# Altium PCB PCB1.PcbDoc
Units mm, origin at the board's own origin, x right, y up, seen from the top; angles counter-clockwise.
Board outline 66.04 x 68.83 mm, 2 copper layers (Top Layer, Bottom Layer); 57 components, 46 nets, 160 pads, 23 vias.
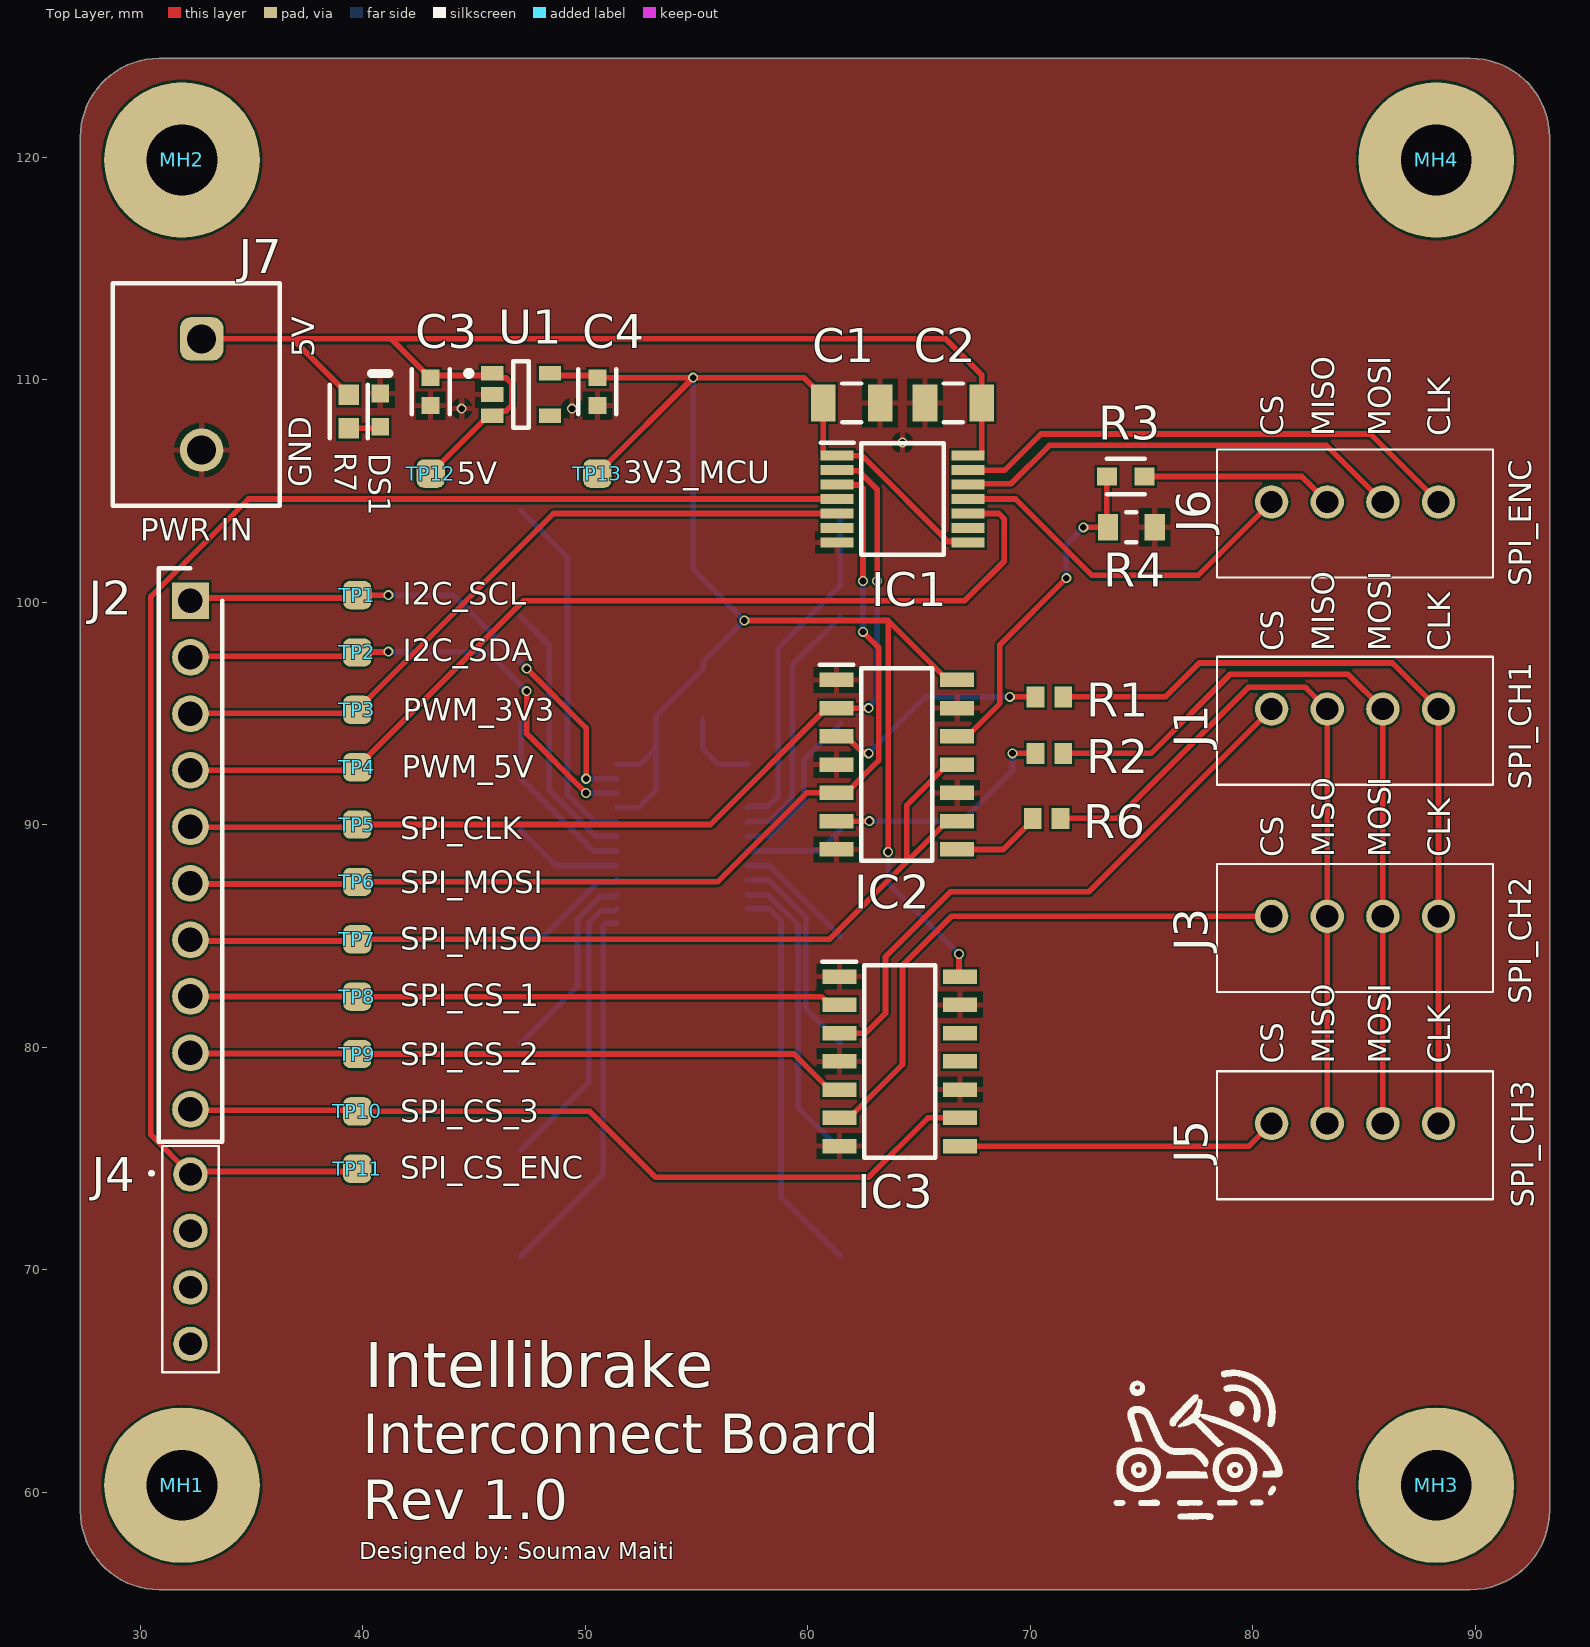
[diagram p0: Top Layer view]
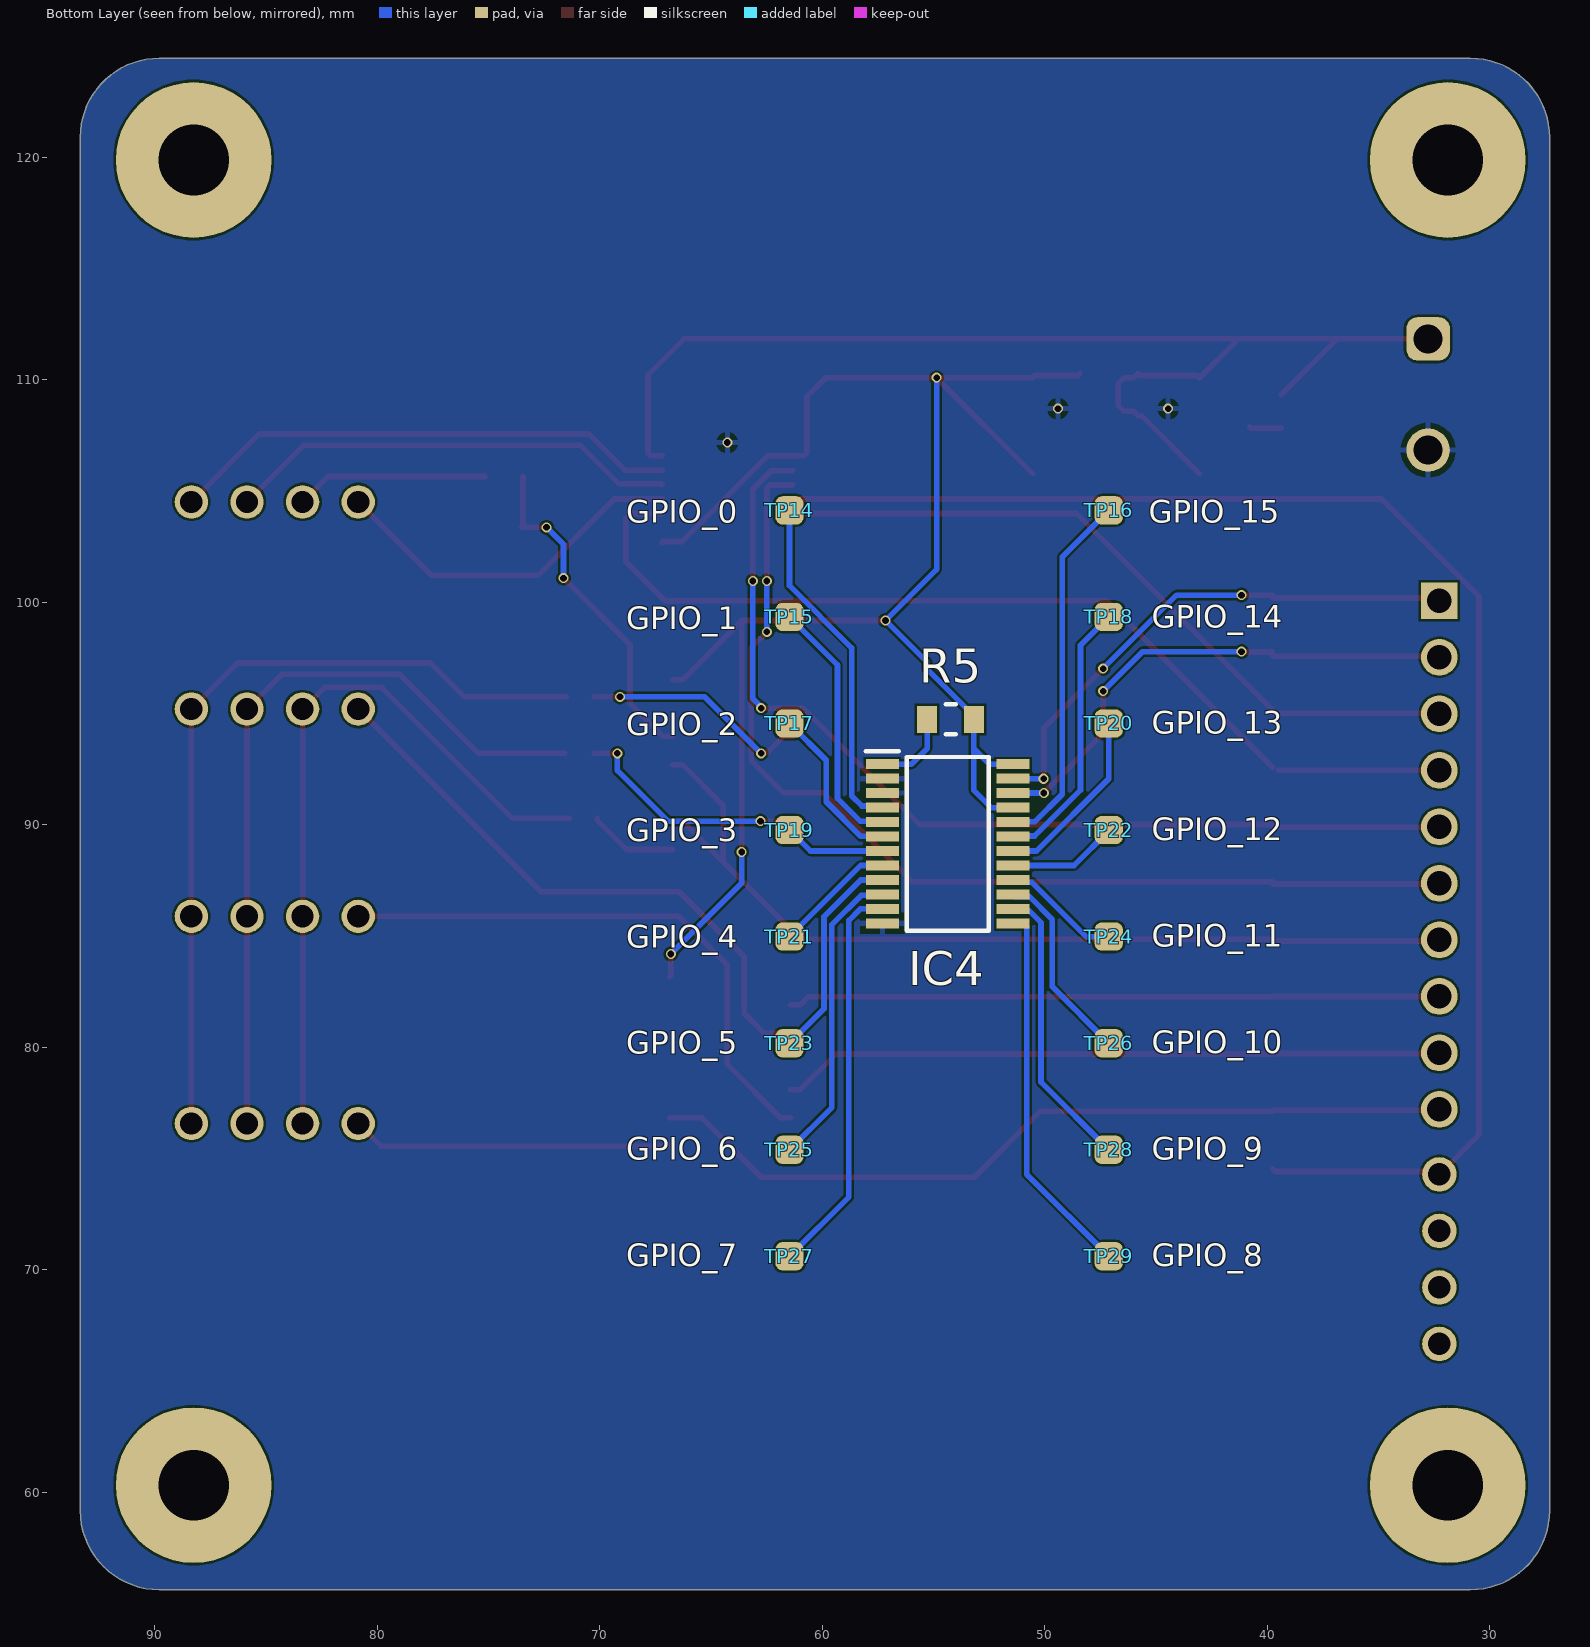
[diagram p1: Bottom Layer view, seen from below]
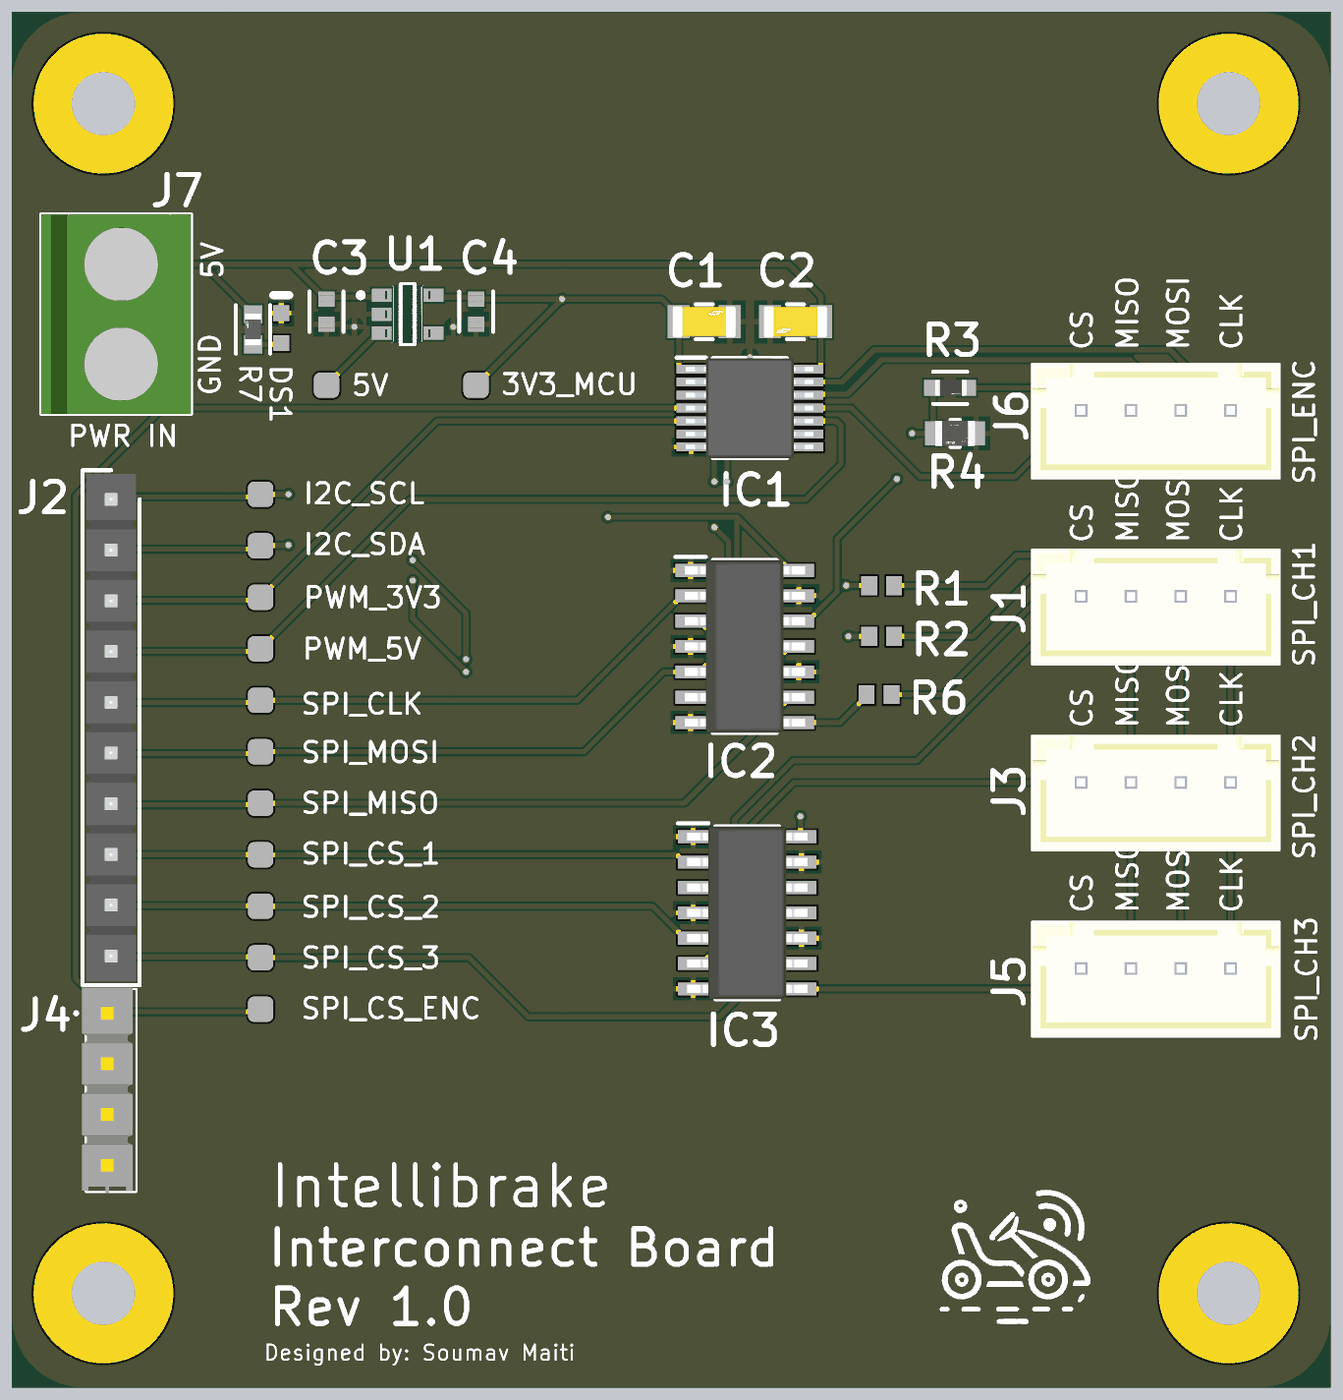
[diagram p2: 3D render of the assembled board from above, using the file's embedded part models]

## Layer stack, top to bottom
Top Solder: solder mask 0.0102, Solder Resist, Dk 3.5
Top Layer: signal copper 0.0356
Dielectric 1: dielectric 0.32, FR-4, Dk 4.8
Bottom Layer: signal copper 0.0356
Bottom Solder: solder mask 0.0102, Solder Resist, Dk 3.5

## Board outline
30.861,55.626 89.789,55.626 ccw(c89.789,59.182) 93.345,59.182 93.345,120.904 ccw(c89.789,120.904) 89.789,124.46 30.861,124.46 ccw(c30.861,120.904) 27.305,120.904 27.305,59.182 ccw(c30.861,59.182)

## Design rules (kind name [scope] priority, off if disabled: settings)
Clearance [All] p1: gap=0.1 ignorepadtopadclearanceinfootprint=FALSE
PolygonConnect [All] p1: connectstyle=Relief reliefconductorwidth=0.254 reliefentries=4 polygonreliefangle="90 Angle" airgapwidth=0.254
RoutingVias [All] p1: holewidth=0.711 width=1.27 viastyle="Through Hole" minholewidth=0.711 minwidth=1.27 maxholewidth=0.711 maxwidth=1.27
SolderMaskExpansion [All] p1: expansion=0.102 istentingtop=FALSE
SupplyNets "Schematic Supply Nets_2" [InNet('3V3')] p1: voltage=0.000
SupplyNets "Schematic Supply Nets_1" [InNet('VIN_5V')] p2: voltage=0.000
SupplyNets "Schematic Supply Nets" [InNet('GND')] p3: voltage=0.000
Width [All] p1: maxlimit=1 minlimit=0.1 preferedwidth=0.254
30 further rules are at their usual default settings.

## Components (designator, comment, footprint, x,y, rotation, side; value= is the part's Value field where it differs from the comment)
C1 "100nF 50V" FP-CL31-IPC_C 61.976,108.966 r0 top
C2 "100nF 50V" FP-CL31-IPC_C 66.548,108.966 r180 top
C3 "1uF" FP-CL10-IPC_C 43.053,109.474 r270 top
C4 "1uF" FP-CL10-IPC_C 50.546,109.474 r270 top
DS1 "HSMY-C190" AVAG-HSMX-C190_V 40.786,108.647 r90 top
IC1 "LSF0204PWJ" SOP65P640X110-14N 64.262,104.648 r0 top
IC2 "SN74LVC125ADR" SOIC127P600X175-14N 64.008,92.71 r0 top
IC3 "SN74LVC125ADR" SOIC127P600X175-14N 64.135,79.375 r0 top
IC4 "TCA9555PWR" SOP65P640X120-24N 54.356,89.154 r180 bottom
J1 "B4B-XH-A_LF__SN_" B4BXHALFSN 88.352,95.208 r180 top
J2 "PH1-10-UA" HDRV10W64P0X254_1X10_2540X249X886P 32.258,100.076 r90 top
J3 "B4B-XH-A_LF__SN_" B4BXHALFSN 88.352,85.894 r180 top
J4 "TSW-104-06-S-S" TSW-104-XX-YY-S 32.258,74.295 r270 top
J5 "B4B-XH-A_LF__SN_" B4BXHALFSN 88.352,76.581 r180 top
J6 "B4B-XH-A_LF__SN_" B4BXHALFSN 88.352,104.521 r180 top
J7 "691137710002" 691137710002 32.512,109.347 r270 top
MH1 "MH?" "Mounting Hole" 31.75,60.325 r0 top
MH2 "MH?" "Mounting Hole" 31.75,119.888 r0 top
MH3 "MH?" "Mounting Hole" 88.123,60.325 r0 top
MH4 "MH?" "Mounting Hole" 88.123,119.888 r0 top
R1 "33Ω" RESC1609X50X30NL10T20 70.866,95.758 r0 top
R2 "33Ω" RESC1609X50X30NL10T20 70.866,93.218 r0 top
R3 "10kΩ" FP-RT0603-MFG 74.295,105.664 r0 top value=10KΩ
R4 "20kΩ" FP-RT0805-MFG 74.549,103.378 r180 top value=20KΩ
R5 "4.7kΩ" FP-RT0805-MFG 54.229,94.742 r180 bottom value=4.7KΩ
R6 "33Ω" RESC1609X50X30NL10T20 70.739,90.297 r0 top
R7 "1.5kΩ" FP-RC1608-IPC_B 39.37,108.585 r90 top
TP1 "TP" Testpoint 39.751,100.33 r180 top
TP2 "TP" Testpoint 39.751,97.752 r180 top
TP3 "TP" Testpoint 39.751,95.174 r180 top
TP4 "TP" Testpoint 39.751,92.596 r180 top
TP5 "TP" Testpoint 39.751,90.018 r180 top
TP6 "TP" Testpoint 39.751,87.439 r180 top
TP7 "TP" Testpoint 39.751,84.861 r180 top
TP8 "TP" Testpoint 39.751,82.283 r180 top
TP9 "TP" Testpoint 39.751,79.705 r180 top
TP10 "TP" Testpoint 39.751,77.127 r180 top
TP11 "TP" Testpoint 39.751,74.549 r180 top
TP12 "TP" Testpoint 43.053,105.791 r90 top
TP13 "TP" Testpoint 50.546,105.791 r90 top
TP14 "TP" Testpoint 61.468,104.14 r180 bottom
TP15 "TP" Testpoint 61.468,99.35 r180 bottom
TP16 "TP" Testpoint 47.117,104.14 r180 bottom
TP17 "TP" Testpoint 61.468,94.561 r180 bottom
TP18 "TP" Testpoint 47.117,99.35 r180 bottom
TP19 "TP" Testpoint 61.468,89.771 r180 bottom
TP20 "TP" Testpoint 47.117,94.561 r180 bottom
TP21 "TP" Testpoint 61.468,84.981 r180 bottom
TP22 "TP" Testpoint 47.117,89.771 r180 bottom
TP23 "TP" Testpoint 61.468,80.191 r180 bottom
TP24 "TP" Testpoint 47.117,84.981 r180 bottom
TP25 "TP" Testpoint 61.468,75.402 r180 bottom
TP26 "TP" Testpoint 47.117,80.191 r180 bottom
TP27 "TP" Testpoint 61.468,70.612 r180 bottom
TP28 "TP" Testpoint 47.117,75.402 r180 bottom
TP29 "TP" Testpoint 47.117,70.612 r180 bottom
U1 "MIC5504-3.3YM5-TR" FP-SOT23-5LD-PL-1-MFG 47.117,109.347 r0 top

## Footprints (in the part's own frame and the unit in brackets; to place one, negate y for a bottom-side part, rotate by r counter-clockwise, add the part's x,y. Pads: shape width x height; smd on the part's side, far side on the other; paste and mask are expansions set on the pad)
691137710002 [mm] "Horizontal Cable Entry with Pressure Clamp, pitch 5mm, 02p"
  rrect50% 1.95x1.95 hole 1.3: 1(-2.5,0.25)
  round 1.95 hole 1.3: 2(2.5,0.25)
  silkscreen extent -5,-3.75 5,3.75, body extent -5,-3.75 5,3.75, height 11.6
AVAG-HSMX-C190_V [mm] "SMD, 2-Leads, Body 1.6x0.8mm, Height 0.9mm"
  rect 0.8x0.8 smd: 1(-0.75,0) 2(0.75,0)
  silkscreen extent 1.65,-0.4 1.65,0.4, body extent -0.8,-0.4 0.8,0.4, height 0.9
B4BXHALFSN [mm]
  round 1.5 hole 1: 1(0,0) 2(2.5,0) 3(5,0) 4(7.5,0)
  silkscreen extent -2.45,-2.35 9.95,3.4, body extent -2.45,-2.35 9.95,3.4, height 7.52
FP-CL10-IPC_C [mm]
  rect 0.758x0.812 smd paste+0 mask+0: 1(-0.627,0) 2(0.627,0)
  silkscreen extent -1.01,-0.85 1.01,0.85, body extent -1.11,-0.55 1.11,0.55, height 0.25
FP-CL31-IPC_C [mm]
  rect 1.105x1.658 smd paste+0 mask+0: 1(-1.276,0) 2(1.276,0)
  silkscreen extent -0.42,-0.87 0.42,0.87, body extent -1.93,-0.97 1.93,0.97, height 0.25
FP-RC1608-IPC_B [mm]
  rect 0.91x0.912 smd paste+0 mask+0: 1(-0.751,0) 2(0.751,0)
  silkscreen extent -1.21,-0.86 1.21,0.86, body extent -1.46,-0.71 1.46,0.71, height 0.25
FP-RT0603-MFG [mm]
  rect 0.9x0.8 smd paste+0 mask+0: 1(-0.85,0) 2(0.85,0)
  silkscreen extent -0.85,-0.81 0.86,0.8, body extent -1.4,-0.55 1.4,0.55, height 0.25
FP-RT0805-MFG [mm]
  rect 0.9x1.2 smd paste+0 mask+0: 1(-1.05,0) 2(1.05,0)
  silkscreen extent -0.23,-0.67 0.23,0.67, body extent -1.6,-0.77 1.6,0.77, height 0.25
FP-SOT23-5LD-PL-1-MFG [mm]
  rect 1x0.66 smd paste+0 mask+0: 1(-1.3,0.95) 2(-1.3,0) 3(-1.3,-0.95) 4(1.3,-0.95) 5(1.3,0.95)
  silkscreen extent -2.47,-1.5 0.35,1.5, body extent -1.9,-1.6 1.9,1.6, height 0.25
HDRV10W64P0X254_1X10_2540X249X886P [mm]
  rect 1.65x1.65 hole 1.1: 1(0,0)
  round 1.65 hole 1.1: 2(-2.54,0) 3(-5.08,0) 4(-7.62,0) 5(-10.16,0) 6(-12.7,0) 7(-15.24,0) 8(-17.78,0) 9(-20.32,0) 10(-22.86,0)
  silkscreen extent -24.32,-1.44 1.46,1.44, body extent -24.13,-1.24 1.27,1.24, height 8.86
"Mounting Hole" [mm]
  round 7 hole 3.175: 4(0.127,0)
RESC1609X50X30NL10T20 [mm] "Chip Resistor, 2-Leads, Body 1.55x0.85mm, IPC Medium Density"
  rect 0.8x0.95 smd: 1(-0.625,0) 2(0.625,0)
  body extent -0.82,-0.48 0.82,0.48, height 0.5
SOIC127P600X175-14N [mm]
  rect 1.525x0.65 smd: 1(-2.712,3.81) 2(-2.712,2.54) 3(-2.712,1.27) 4(-2.712,0) 5(-2.712,-1.27) 6(-2.712,-2.54) 7(-2.712,-3.81) 8(2.712,-3.81) 9(2.712,-2.54) 10(2.712,-1.27) 11(2.712,0) 12(2.712,1.27) 13(2.712,2.54) 14(2.712,3.81)
  silkscreen extent -3.47,-4.33 1.6,4.48, body extent -3.01,-4.33 3.01,4.33, height 1.75
SOP65P640X110-14N [mm]
  rect 1.475x0.45 smd: 1(-2.938,1.95) 2(-2.938,1.3) 3(-2.938,0.65) 4(-2.938,0) 5(-2.938,-0.65) 6(-2.938,-1.3) 7(-2.938,-1.95) 8(2.938,-1.95) 9(2.938,-1.3) 10(2.938,-0.65) 11(2.938,0) 12(2.938,0.65) 13(2.938,1.3) 14(2.938,1.95)
  silkscreen extent -3.67,-2.5 1.85,2.52, body extent -3.2,-2.5 3.2,2.5, height 1.1
SOP65P640X120-24N [mm]
  rect 1.475x0.45 smd: 1(-2.938,3.575) 2(-2.938,2.925) 3(-2.938,2.275) 4(-2.938,1.625) 5(-2.938,0.975) 6(-2.938,0.325) 7(-2.938,-0.325) 8(-2.938,-0.975) 9(-2.938,-1.625) 10(-2.938,-2.275) 11(-2.938,-2.925) 12(-2.938,-3.575) 13(2.938,-3.575) 14(2.938,-2.925) 15(2.938,-2.275) 16(2.938,-1.625) 17(2.938,-0.975) 18(2.938,-0.325) 19(2.938,0.325) 20(2.938,0.975) 21(2.938,1.625) 22(2.938,2.275) 23(2.938,2.925) 24(2.938,3.575)
  silkscreen extent -3.67,-3.9 1.85,4.15, body extent -3.2,-3.9 3.2,3.9, height 1.13
Testpoint [mm]
  rrect50% 1.27x1.27 smd: 0(0,0)
TSW-104-XX-YY-S [mm]
  round 1.55 hole 1.02: 1(0,0) 2(2.54,0) 3(5.08,0) 4(7.62,0)
  silkscreen extent -1.27,-1.8 8.89,1.27, body extent -1.33,-1.46 8.96,1.08, height 10.5

## Part data
C1 C2: library part CMP-13271-001276-1, "Cap Ceramic 100nF 50V X7R ±10% SMD 1206 +125°C Embossed T/R", Capacitance=100nF, Case Code (Imperial)=1206, Case Code (Metric)=3216, Dielectric=X7R, Max Operating Temperature=125°C, Min Operating Temperature=-55°C, Package Quantity=1, Tolerance=10%, Voltage Rating=50V, Case/Package=1206, Depth=1.6mm, Height=0.85mm, Length=0.126inch, Mount="Surface Mount", Packaging="Tape and Reel", Radiation Hardening=No, Thickness=0.037inch, Width=0.063inch
C3 C4: library part CMP-13271-003399-1, "Cap Ceramic 1uF 10V X5R ±10% Pad SMD 0603 +85°C T/R", Case Code (Imperial)=0603, Case Code (Metric)=1608, Dielectric=X5R, Max Operating Temperature=85°C, Min Operating Temperature=-55°C, Package Quantity=1, Tolerance=10%, Voltage=10V, Capacitance=1uF, Case/Package=0603, Contact Plating=Tin, Depth=0.8mm, Height=0.8mm, Length=1.6mm, Mount="Surface Mount", Packaging="Tape and Reel", Radiation Hardening=No, Thickness=0.035inch, Voltage Rating=10V, Width=0.031inch
DS1: library part CMP-1744-00003-1, "LED Uni-Color Yellow, 65 mW, 20 mA, -40 to 85 degC, 2-Pin SMD, RoHS, Tape and Reel", Case Code (Imperial)=0603, Case Code (Metric)=1608, Max Operating Temperature="155 degC", Min Operating Temperature="-55 degC", Package Quantity=5000, Power Rating="100 mW", Resistance="390 Ohm", Tolerance=1%, Voltage Rating="50 V", Case\Package=0603, ComponentLink1Description="Manufacturer URL", ComponentLink1URL=http://www.avagotech.com/, ComponentLink2Description=Datasheet, ComponentLink2URL=http://docs.avagotech.com/docs/AV02-0551EN, ComponentLink3Description="Package Specification", ComponentLink3URL=http://www.fairchildsemi.com/dwg/MA/MA03D.pdf, DatasheetVersion=Mar-12, Height="0.45 mm", Length="1.6 mm", Mount="Surface Mount", PackageDescription="2-Pin Surface Mount Device, Body 1.6 x 0.8 mm, Height 0.9 mm", PackageReference=HSMX-C190, Packaging="Tape and Reel", Pins=2, REACH SVHC="No SVHC", RoHSCompliant=true, Voltage Rating (DC)="50 V", Width="0.8 mm"
IC1: "Integrated Circuit", Manufacturer_Name=Nexperia, Mouser Part Number=771-LSF0204PWJ, Arrow Part Number=LSF0204PWJ, Arrow Price/Stock=null?region=nac, Datasheet Link=https://assets.nexperia.com/documents/data-sheet/LSF0204.pdf, Height=1.1mm, Manufacturer_Part_Number=LSF0204PWJ, Mouser Price/Stock=https://www.mouser.co.uk/ProductDetail/Nexperia/LSF0204PWJ?qs=sPbYRqrBIVlVSmmo7LgSzQ%3D%3D
IC2 IC3: "Integrated Circuit", Manufacturer_Name="Texas Instruments", Mouser Part Number=595-SN74LVC125ADR, Arrow Part Number=SN74LVC125ADR, Arrow Price/Stock=https://www.arrow.com/en/products/sn74lvc125adr/texas-instruments?utm_currency=USD&region=nac, Datasheet Link=http://www.ti.com/lit/gpn/sn74lvc125a, Height=1.75mm, Manufacturer_Part_Number=SN74LVC125ADR, Mouser Price/Stock=https://www.mouser.co.uk/ProductDetail/Texas-Instruments/SN74LVC125ADR?qs=rgxfVHSNRPX26uoxCHh71w%3D%3D
IC4: "Integrated Circuit", Manufacturer_Name="Texas Instruments", Mouser Part Number=595-TCA9555PWR, Arrow Part Number=TCA9555PWR, Arrow Price/Stock=https://www.arrow.com/en/products/tca9555pwr/texas-instruments?region=nac, Datasheet Link=https://www.ti.com/lit/gpn/TCA9555, Height=1.2mm, Manufacturer_Part_Number=TCA9555PWR, Mouser Price/Stock=https://www.mouser.co.uk/ProductDetail/Texas-Instruments/TCA9555PWR?qs=O3wcJz4o8IeDwg4St4nEYQ%3D%3D
J1 J3 J5 J6: "Connector", Arrow Part Number=B4B-XH-A(LF)(SN), Manufacturer_Name="JST (JAPAN SOLDERLESS TERMINALS)", Mouser Part Number=306-B4BXHALFSN, Arrow Price/Stock=https://www.arrow.com/en/products/b4b-xh-a-lf-sn/jst-manufacturing?utm_currency=USD&region=europe, Datasheet Link=https://datasheet.lcsc.com/szlcsc/JST-Sales-America-B4B-XH-A-LF-SN_C144395.pdf, Height=7mm, Manufacturer_Part_Number=B4B-XH-A(LF)(SN), Mouser Price/Stock=https://www.mouser.co.uk/ProductDetail/JST-Commercial/B4B-XH-ALFSN?qs=cdbOS8ANM9CfC08d%252BywhFw%3D%3D
J2: "Connector", Manufacturer_Name="Adam Tech", Mouser Part Number=737-PH1-10-UA, Arrow Part Number=PH1-10-UA, Arrow Price/Stock=null?utm_currency=USD&region=nac, Datasheet Link=https://app.adam-tech.com/products/download/data_sheet/201605/ph1-xx-ua-data-sheet.pdf, Height=8.865mm, Manufacturer_Part_Number=PH1-10-UA, Mouser Price/Stock=https://www.mouser.co.uk/ProductDetail/Adam-Tech/PH1-10-UA?qs=ogqIPVdloe%252Bff9mnAAAy9w%3D%3D
J4: "Connector", Manufacturer_Name=SAMTEC, Datasheet Link=http://suddendocs.samtec.com/prints/tsw-xxx-xx-xxx-x-xx-xxx-mkt.pdf, Manufacturer_Part_Number=TSW-104-06-S-S
J7: library part CMP-1502-03324-2, Current Rating=16A, Max Operating Temperature=120°C, Min Operating Temperature=-30°C, Voltage Rating=300V, Contact Material="Nickel, Tin", Height=11.6mm, Lead Pitch=5mm, NexarPartId=78871135, Number Of Contacts=2, Number of Pins=2, Number Of Rows=1, Packaging=Box, RoHS=Non-Compliant
MH1 MH2 MH3 MH4: library part "Mounting Hole"
R1 R2 R6: library part CMP-2000-03252-1, Manufacturer="Vishay Dale", Part Number=CRCW060333R0JNTA
R3: library part CMP-2000-04517-2, "RES SMD 10K OHM 0.1% 1/10W 0603", Manufacturer=Yageo, Manufacturer Part Number=RT0603BRE0710KL, Package=RT0603, Power Rating=0.1W, Resistance=10KΩ, Temperature="-55°C to +155°C", Temperature Coefficient="50 ppm/°C", Temperature Range High=+155°C, Temperature Range Low=-55°C, Tolerance=0.001, Voltage Rating=75V, Automotive=No, Category=Res, ComponentLink2Description=Datasheet, ComponentLink2URL=http://www.yageo.com/documents/recent/PYu-RT_1-to-0.01_RoHS_L_9.pdf, Composition="Thin Film", Device Class L1="Passive Components", Device Class L2=Resistors, Device Class L3="Chip SMD Resistors", Digikey Description="RES SMD 10K OHM 0.1% 1/10W 0603", Footprint Url=http://www.yageo.com/exep/pages/download/literatures/PYu-R_Mount_10.pdf, Height=0.55mm, Ipc Land Pattern Name=RESC16080X45, Lead Free=Yes, Mouser Description="Res Thin Film 0603 10K Ohm 0.1% 1/10W ±50ppm/°C Molded SMD SMD Paper T/R", Octopart=https://octopart.com/rt0603bre0710kl-yageo-1273959, RoHS=TRUE, Series=RT
R4: library part CMP-2001-01463-2, "RES SMD 20K OHM 1% 1/8W 0805", Manufacturer=Yageo, Manufacturer Part Number=RT0805FRE0720KL, Package=RT0805, Power Rating=0.125W, Resistance=20KΩ, Temperature="-55°C to +155°C", Temperature Coefficient="50 ppm/°C", Temperature Range High=+155°C, Temperature Range Low=-55°C, Tolerance=0.0001, Voltage Rating=150V, Automotive=No, Category=Res, ComponentLink2Description=Datasheet, ComponentLink2URL=http://www.yageo.com/documents/recent/PYu-RT_1-to-0.01_RoHS_L_9.pdf, Composition="Thin Film", Device Class L1="Passive Components", Device Class L2=Resistors, Device Class L3="Chip SMD Resistors", Digikey Description="RES SMD 20K OHM 1% 1/8W 0805", Footprint Url=http://www.yageo.com/exep/pages/download/literatures/PYu-R_Mount_10.pdf, Height=0.6mm, Ipc Land Pattern Name=RESC200125X50, Lead Free=Yes, Mouser Description="Thin Film Resistors - SMD 1/8W 20K ohm 1% 50ppm", Octopart=https://octopart.com/rt0805fre0720kl-yageo-1410620, RoHS=TRUE, Series=RT
R5: library part CMP-03412-019393-1, "RES SMD 4.7K OHM 1% 1/8W 0805", Manufacturer=Yageo, Manufacturer Part Number=RT0805FRE074K7L, Package=RT0805, Power Rating=0.125W, Resistance=4.7KΩ, Temperature="-55°C to +155°C", Temperature Coefficient="50 ppm/°C", Temperature Range High=+155°C, Temperature Range Low=-55°C, Tolerance=0.0001, Voltage Rating=150V, Automotive=No, Category=Res, ComponentLink2Description=Datasheet, ComponentLink2URL=http://www.yageo.com/documents/recent/PYu-RT_1-to-0.01_RoHS_L_9.pdf, Composition="Thin Film", Device Class L1="Passive Components", Device Class L2=Resistors, Device Class L3="Chip SMD Resistors", Digikey Description="RES SMD 4.7K OHM 1% 1/8W 0805", Footprint Url=http://www.yageo.com/exep/pages/download/literatures/PYu-R_Mount_10.pdf, Height=0.6mm, Ipc Land Pattern Name=RESC200125X50, Lead Free=Yes, Mouser Description="Thin Film Resistors - SMD 1/8W 4.7K ohm 1% 50ppm", Octopart=https://octopart.com/rt0805fre074k7l-yageo-40047233, RoHS=TRUE, Series=RT
R7: library part CMP-13261-004935-1, "Res Thick Film 0603 1.5kΩ 1% 0.1W ±100ppm/°C Molded SMD T/R", Case/Package=0603, Max Operating Temperature=155°C, Min Operating Temperature=-55°C, Power Rating=100mW, Resistance=1.5kR, Temperature Coefficient=100ppm/°C, Tolerance=1%, Voltage Rating (DC)=50V, Composition="Thick Film", Contact Plating=Tin, Depth=0.8mm, Lead Free="Lead Free", Length=1.6mm, Military Standard=Not, Packaging="Tape and Reel", Radiation Hardening=No, Width=800um
TP1 TP2 TP3 TP4 TP5 TP6 TP7 TP8 TP9 TP10 TP11 TP12 TP13 TP14 TP15 TP16 TP17 TP18 TP19 TP20 TP21 TP22 TP23 TP24 TP25 TP26 TP27 TP28 TP29: library part Testpoint
U1: library part CMP-2000-07604-2, "IC REG LINEAR 3.3V 300MA SOT23-5", Case/Package=SOT-23-5, Dropout Voltage=380mV, Max Input Voltage=5.5V, Max Operating Temperature=125°C, Max Output Current=300mA, Min Input Voltage=2.5V, Min Operating Temperature=-40°C, Nominal Output Voltage=3.3V, Operating Supply Current=42uA, Power Supply Rejection Ratio (PSRR)=60dB, Quiescent Current=38uA, Accuracy=3%, Height=1.1mm, Length=2.9mm, Mount="Surface Mount", Number of Outputs=1, Number of Pins=5, Output Current=300mA, Output Type=Fixed, Output Voltage=3.3V, Packaging="Tape and Reel", REACH SVHC="No SVHC", Width=1.6mm

## Via types
v1: diameter 0.45, hole 0.3, Top Layer to Bottom Layer, tented both sides, 23 vias

## Nets (pads, with @x,y where several pads share a name; then routed paths per layer and width w, separated by ;. In a path a pad name is that pad's centre, name@x,y a point inside that pad or via, vN(x,y) a via of type N, cw(c..) or ccw(c..) an arc to the next point about the centre after c; other vN are vias at no path point)
3V3: C1.1 C4.1 IC1.1 IC1.8 IC2.14 IC3.14 IC4.21 IC4.24 R5.2 TP13.0 U1.5 | length 82.8
  Top Layer w0.254: U1.5 48.515,110.199 50.448,110.199 C4.1 v1(54.856,110.101) ; TP13.0 v1(54.856,110.101) ; v1(57.15,99.187) 63.616,99.187 ; v1@63.627,88.773 v1(63.616,88.784) 63.616,99.187 ; IC2.14 66.283,96.52 63.616,99.187 ; v1(66.802,84.201) 66.802,83.23 IC3.14 ; IC1.8 67.156,102.742 66.299,102.742 62.443,106.598 IC1.1 60.811,106.598 60.7,106.71 C1.1 60.7,109.242 59.841,110.101 v1(54.856,110.101)
  Bottom Layer w0.254: IC4.21 52.404,90.779 52.596,90.971 53.179,91.554 53.179,93.438 ; IC4.24 52.47,92.729 53.179,93.438 ; v1(54.856,110.101) 54.856,101.481 v1(57.15,99.187) 55.294,97.331 55.294,97.007 53.179,94.892 R5.2 53.179,93.438 ; v1(63.616,88.784) 63.616,87.387 v1(66.802,84.201)
GND: C1.2 C2.2 C3.2 C4.2 DS1.2 IC1.7 IC2.1 IC2.4 IC2.7 IC2.10 IC2.13 IC3.1 IC3.4 IC3.7 IC3.10 IC3.13 IC4.2 IC4.3 IC4.12 J7.2 R4.1 U1.2
  other v1: 64.262,107.188 44.45,108.712 49.403,108.712
GPIO_0: IC4.4 TP14.0 | length 15.6
  Bottom Layer w0.254: IC4.4 57.368,90.853 58.214,90.853 58.674,91.313 58.674,97.961 61.468,100.755 TP14.0
GPIO_1: IC4.5 TP15.0 | length 11.5
  Bottom Layer w0.254: IC4.5 57.335,90.17 58.293,90.17 59.309,91.186 59.309,97.191 TP15.0
GPIO_2: IC4.6 TP17.0 | length 7.4
  Bottom Layer w0.254: IC4.6 57.303,89.488 58.264,89.488 59.817,91.042 59.817,92.91 TP17.0
GPIO_3: IC4.7 TP19.0 | length 4.6
  Bottom Layer w0.254: IC4.7 60.526,88.829 TP19.0
GPIO_4: IC4.8 TP21.0 | length 5.5
  Bottom Layer w0.254: IC4.8 58.27,88.179 TP21.0
GPIO_5: IC4.9 TP23.0 | length 9.6
  Bottom Layer w0.254: IC4.9 58.267,87.529 59.919,85.877 59.919,81.74 TP23.0
GPIO_6: IC4.10 TP25.0 | length 13.7
  Bottom Layer w0.254: IC4.10 57.336,86.837 58.245,86.837 59.563,85.518 59.563,77.307 TP25.0
GPIO_7: IC4.11 TP27.0 | length 17.9
  Bottom Layer w0.254: IC4.11 58.285,86.229 58.801,85.713 58.801,73.279 TP27.0
GPIO_8: IC4.13 TP29.0 | length 17
  Bottom Layer w0.254: TP29.0 50.807,74.302 50.807,85.481 50.905,85.579 IC4.13
GPIO_9: IC4.14 TP28.0 | length 13
  Bottom Layer w0.254: TP28.0 50.165,78.45 50.165,85.61 50.686,86.131 51.32,86.131 IC4.14
GPIO_10: IC4.15 TP26.0 | length 8.8
  Bottom Layer w0.254: TP26.0 49.657,82.731 49.657,85.752 50.686,86.781 51.32,86.781 IC4.15
GPIO_11: IC4.16 TP24.0 | length 5.4
  Bottom Layer w0.254: TP24.0 48.133,84.981 50.583,87.431 51.32,87.431 IC4.16
GPIO_12: IC4.17 TP22.0 | length 5
  Bottom Layer w0.254: TP22.0 47.117,89.738 48.676,88.179 IC4.17
GPIO_13: IC4.18 TP20.0 | length 8.1
  Bottom Layer w0.254: TP20.0 47.117,92.075 50.363,88.829 IC4.18
GPIO_14: IC4.19 TP18.0 | length 12.2
  Bottom Layer w0.254: TP18.0 48.387,98.08 48.387,91.567 50.45,89.504 51.393,89.504 IC4.19
GPIO_15: IC4.20 TP16.0 | length 16.4
  Bottom Layer w0.254: TP16.0 49.206,102.051 49.206,91.383 50.448,90.141 51.406,90.141 IC4.20
I2C_SCL: IC4.23 J2.1 TP1.0 | length 24
  Top Layer w0.254: J2.1 32.385,100.203 TP1.0@39.751,100.203 ; TP1.0 v1(41.148,100.33) ; v1(47.371,97.028) 50.04,94.359 v1(50.04,92.077)
  Bottom Layer w0.254: v1(41.148,100.33) 44.069,100.33 v1(47.371,97.028) ; IC4.23 51.417,92.078 v1(50.04,92.077) ; v1(50.04,92.077) v1(50.04,92.077)
I2C_SDA: IC4.22 J2.2 TP2.0 | length 22.9
  Top Layer w0.254: J2.2 32.302,97.58 TP2.0@39.751,97.58 ; TP2.0 39.77,97.771 41.129,97.771 v1(41.148,97.79) ; v1(47.371,96.012) 47.371,94.107 v1(50.038,91.44)
  Bottom Layer w0.254: v1(41.148,97.79) 45.593,97.79 v1(47.371,96.012) ; v1(50.038,91.44) 50.044,91.434 51.413,91.434 IC4.22
IO_EXP_INT: IC4.1 R5.1 | length 3.6
  Bottom Layer w0.254: R5.1 55.279,93.438 55.988,92.729 IC4.1
NetDS1_1: DS1.1 R7.1 | length 1.4
  Top Layer w0.254: R7.1 40.723,107.834 DS1.1
PWM_CH_A_3V3: IC1.5 J2.3 TP3.0 | length 32.7
  Top Layer w0.254: J2.3 32.283,95.021 TP3.0@39.751,95.021 ; TP3.0 48.575,103.998 IC1.5
PWM_CH_A_5V: IC1.10 J2.4 TP4.0 | length 43.8
  Top Layer w0.254: J2.4 32.264,92.462 TP4.0@39.497,92.462 ; TP4.0 47.231,100.076 67.056,100.076 68.834,101.854 68.834,103.759 68.595,103.998 IC1.10
SPI_CLK: IC1.2 IC2.2 J2.5 TP5.0 | length 44.8
  Top Layer w0.254: J2.5 32.271,89.903 TP5.0@39.751,89.903 ; TP5.0 55.626,90.018 60.858,95.25 IC2.2 v1(62.738,95.25) ; IC1.2 61.352,105.92 62.289,105.92 63.119,105.09 v1(63.119,100.965)
  Bottom Layer w0.254: v1(62.738,95.25) 62.738,95.303 63.119,95.684 v1(63.119,100.965)
SPI_CLK_5V: IC1.13 J6.1 | length 23.1
  Top Layer w0.254: IC1.13 68.864,105.948 70.485,107.569 85.304,107.569 J6.1
SPI_CLK_BST: IC2.3 R1.1 | length 10.3
  Top Layer w0.254: IC2.3 61.733,93.98 62.458,93.256 62.7,93.256 v1(62.738,93.218) ; v1(69.088,95.758) R1.1
  Bottom Layer w0.254: v1(62.738,93.218) 65.278,95.758 v1(69.088,95.758)
SPI_CLK_OUT: J1.1 J3.1 J5.1 R1.2 | length 37
  Top Layer w0.254: R1.2 76.073,95.758 77.597,97.282 86.278,97.282 J1.1 J3.1 J5.1
SPI_CS_1: IC3.2 J2.8 TP8.0 | length 29.3
  Top Layer w0.254: J2.8 32.264,82.29 39.745,82.29 TP8.0 60.617,82.283 60.985,81.915 IC3.2
SPI_CS_1_OUT: IC3.3 J1.4 | length 26.9
  Top Layer w0.254: IC3.3 62.611,80.645 63.5,81.534 63.5,84.074 66.421,86.995 72.639,86.995 J1.4
SPI_CS_2: IC3.5 J2.9 TP9.0 | length 29.8
  Top Layer w0.254: J2.9 32.283,79.731 39.726,79.731 TP9.0 59.385,79.705 60.985,78.105 IC3.5
SPI_CS_2_OUT: IC3.6 J3.4 | length 25.8
  Top Layer w0.254: IC3.6 61.86,76.835 64.262,79.237 64.262,83.693 66.463,85.894 J3.4
SPI_CS_3: IC3.9 J2.10 TP10.0 | length 37
  Top Layer w0.254: J2.10 32.302,77.172 39.707,77.172 TP10.0 50.205,77.127 53.164,74.168 62.738,74.168 65.405,76.835 IC3.9
SPI_CS_3_OUT: IC3.8 J5.4 | length 14.4
  Top Layer w0.254: IC3.8 79.836,75.565 J5.4
SPI_CS_ENC: IC1.4 J4.1 TP11.0 | length 67
  Top Layer w0.254: TP11.0 39.624,74.422 32.385,74.422 J4.1 30.48,76.073 30.48,100.269 34.859,104.648 IC1.4
SPI_CS_ENC_5V: IC1.11 J6.4 | length 16.4
  Top Layer w0.254: IC1.11 69.342,104.648 72.771,101.219 77.55,101.219 J6.4
SPI_MISO: IC2.9 IC2.11 J2.7 TP7.0 | length 42.3
  Top Layer w0.254: J2.7 32.309,84.785 TP7.0@39.751,84.785 ; TP7.0 60.974,84.861 64.447,88.334 ; IC2.9 66.283,90.17 64.447,88.334 ; IC2.11 66.283,92.71 64.447,90.874 64.447,88.334
SPI_MISO_3V3: IC2.12 R3.1 R4.2 | length 15.4
  Top Layer w0.254: IC2.12 67.158,93.98 68.636,95.458 68.636,98.1 v1(71.628,101.092) ; v1(72.39,103.378) R4.2@73.445,103.378 ; R3.1 R4.2@73.445,103.378 ; R4.2 R4.2@73.445,103.378
  Bottom Layer w0.254: v1(71.628,101.092) 71.628,102.616 v1(72.39,103.378)
SPI_MISO_5V: J6.3 R3.2 | length 8.7
  Top Layer w0.254: R3.2 82.209,105.664 J6.3
SPI_MISO_BST: IC2.8 R6.1 | length 4
  Top Layer w0.254: IC2.8 68.792,88.9 70.114,90.222 R6.1
SPI_MISO_OUT: J1.3 J3.3 J5.3 R6.2 | length 33.4
  Top Layer w0.254: R6.2 73.914,90.297 79.802,96.185 82.375,96.185 J1.3@83.339,95.22 ; J5.3 J3.3 J1.3
SPI_MOSI: IC1.3 IC2.5 J2.6 TP6.0 | length 47
  Top Layer w0.254: J2.6 32.29,87.344 TP6.0@39.751,87.344 ; TP6.0 55.944,87.439 59.944,91.44 IC2.5 61.733,91.44 63.19,92.897 63.19,97.973 v1(62.484,98.679) ; IC1.3 61.339,105.283 62.335,105.283 62.484,105.134 v1(62.484,100.965)
  Bottom Layer w0.254: v1(62.484,98.679) v1(62.484,100.965)
SPI_MOSI_5V: IC1.12 J6.2 | length 20.4
  Top Layer w0.254: IC1.12 67.244,105.342 69.147,105.342 70.866,107.061 83.312,107.061 J6.2
SPI_MOSI_BST: IC2.6 R2.1 | length 10.7
  Top Layer w0.254: IC2.6 v1(62.771,90.17) ; v1(69.205,93.218) R2.1
  Bottom Layer w0.254: v1(62.771,90.17) 66.929,90.17 69.205,92.446 v1(69.205,93.218)
SPI_MOSI_OUT: J1.2 J3.2 J5.2 R2.2 | length 35
  Top Layer w0.254: R2.2@71.566,93.218 75.438,93.218 78.994,96.774 84.286,96.774 J1.2 J3.2 J5.2
VIN_5V: C2.1 C3.1 IC1.14 J7.1 R7.2 TP12.0 U1.1 U1.3 | length 55.8
  Top Layer w0.254: J7.1 36.858,111.847 ; R7.2 36.858,111.847 ; TP12.0 43.053,105.803 45.647,108.397 U1.3 46.02,108.6 46.439,108.6 46.698,108.859 46.698,109.835 46.439,110.094 46.02,110.094 U1.1 45.719,110.199 43.151,110.199 C3.1 43.026,110.101 41.28,111.847 ; IC1.14 67.713,106.598 67.824,106.71 C2.1 67.824,110.23 66.207,111.847 41.28,111.847 ; 36.858,111.847 41.28,111.847
pads on no net: IC1.6 IC1.9 IC3.11 IC3.12 J4.2 J4.3 J4.4 MH1.4 MH2.4 MH3.4 MH4.4 U1.4

## Polygon pours and split planes (outlines as drawn)
GND on Bottom Layer "GND_L02_P000" (solid, pour order 0): 27.305,120.904 27.305,59.182 ccw(c30.861,59.182) 30.861,55.626 89.789,55.626 ccw(c89.789,59.182) 93.345,59.182 93.345,120.904 ccw(c89.789,120.904) 89.789,124.46 30.861,124.46 ccw(c30.861,120.904)
GND on Top Layer "GND_L01_P002" (solid, pour order 2): 27.305,120.904 27.305,59.182 ccw(c30.861,59.182) 30.861,55.626 89.789,55.626 ccw(c89.789,59.182) 93.345,59.182 93.345,120.904 ccw(c89.789,120.904) 89.789,124.46 30.861,124.46 ccw(c30.861,120.904)

## Silkscreen, mask and mechanical layers (free items; w line width, h text height)
Top Overlay:
  drawing of 20 lines, arcs and shapes, not listed
  text "5V" at 37.821,111.023 h1.02 r90
  text "CS" at 81.382,107.467 h1.02 r90
  text "MISO" at 83.668,107.467 h1.02 r90
  text "MOSI" at 86.208,107.467 h1.02 r90
  text "CLK" at 88.875,107.467 h1.02 r90
  text "3V3_MCU" at 51.714,105.351 h1.02
  text "5V" at 44.221,105.308 h1.02
  text "GND" at 37.694,105.181 h1.02 r90
  text "PWR IN" at 29.997,102.768 h1.02
  text "SPI_ENC" at 92.515,100.736 h1.02 r90
  text "I2C_SCL" at 41.808,99.89 h1.02
  text "CS" at 81.382,97.815 h1.02 r90
  text "MISO" at 83.668,97.815 h1.02 r90
  text "MOSI" at 86.208,97.815 h1.02 r90
  text "CLK" at 88.875,97.815 h1.02 r90
  text "I2C_SDA" at 41.808,97.35 h1.02
  text "PWM_3V3" at 41.808,94.683 h1.02
  text "PWM_5V" at 41.755,92.112 h1.02
  text "SPI_CH1" at 92.515,91.592 h1.02 r90
  text "SPI_CLK" at 41.681,89.349 h1.02
  text "CS" at 81.382,88.544 h1.02 r90
  text "MISO" at 83.668,88.544 h1.02 r90
  text "MOSI" at 86.208,88.544 h1.02 r90
  text "CLK" at 88.875,88.544 h1.02 r90
  text "SPI_MOSI" at 41.681,86.936 h1.02
  text "SPI_MISO" at 41.681,84.396 h1.02
  text "SPI_CH2" at 92.515,81.94 h1.02 r90
  text "SPI_CS_1" at 41.681,81.856 h1.02
  text "CS" at 81.382,79.273 h1.02 r90
  text "MISO" at 83.668,79.273 h1.02 r90
  text "MOSI" at 86.208,79.273 h1.02 r90
  text "CLK" at 88.875,79.273 h1.02 r90
  text "SPI_CS_2" at 41.681,79.189 h1.02
  text "SPI_CS_3" at 41.681,76.649 h1.02
  text "SPI_CS_ENC" at 41.681,74.109 h1.02
  text "SPI_CH3" at 92.642,72.796 h1.02 r90
  text "Intellibrake" at 40.098,64.736 h2.03
  text "Interconnect Board" at 39.995,61.768 h1.78
  text "Rev 1.0" at 40.005,58.801 h1.78
  text "Designed by: Soumav Maiti" at 39.851,56.996 h0.76
Bottom Overlay:
  text "GPIO_15" at 45.314,103.573 h1.02
  text "GPIO_0" at 68.809,103.573 h1.02
  text "GPIO_14" at 45.187,98.874 h1.02
  text "GPIO_1" at 68.809,98.801 h1.02
  text "GPIO_13" at 45.187,94.09 h1.02
  text "GPIO_2" at 68.809,94.03 h1.02
  text "GPIO_12" at 45.187,89.306 h1.02
  text "GPIO_3" at 68.809,89.258 h1.02
  text "GPIO_11" at 45.187,84.523 h1.02
  text "GPIO_4" at 68.809,84.486 h1.02
  text "GPIO_10" at 45.187,79.739 h1.02
  text "GPIO_5" at 68.809,79.715 h1.02
  text "GPIO_9" at 45.187,74.955 h1.02
  text "GPIO_6" at 68.809,74.943 h1.02
  text "GPIO_8" at 45.187,70.172 h1.02
  text "GPIO_7" at 68.809,70.172 h1.02